# Altium PCB ANTENNA.PcbDoc
Units mm, origin at the board's own origin, x right, y up, seen from the top; angles counter-clockwise.
Board outline 45 x 60 mm, 2 copper layers (Top Layer, Bottom Layer); 4 components, 7 nets, 18 pads, 4 vias.
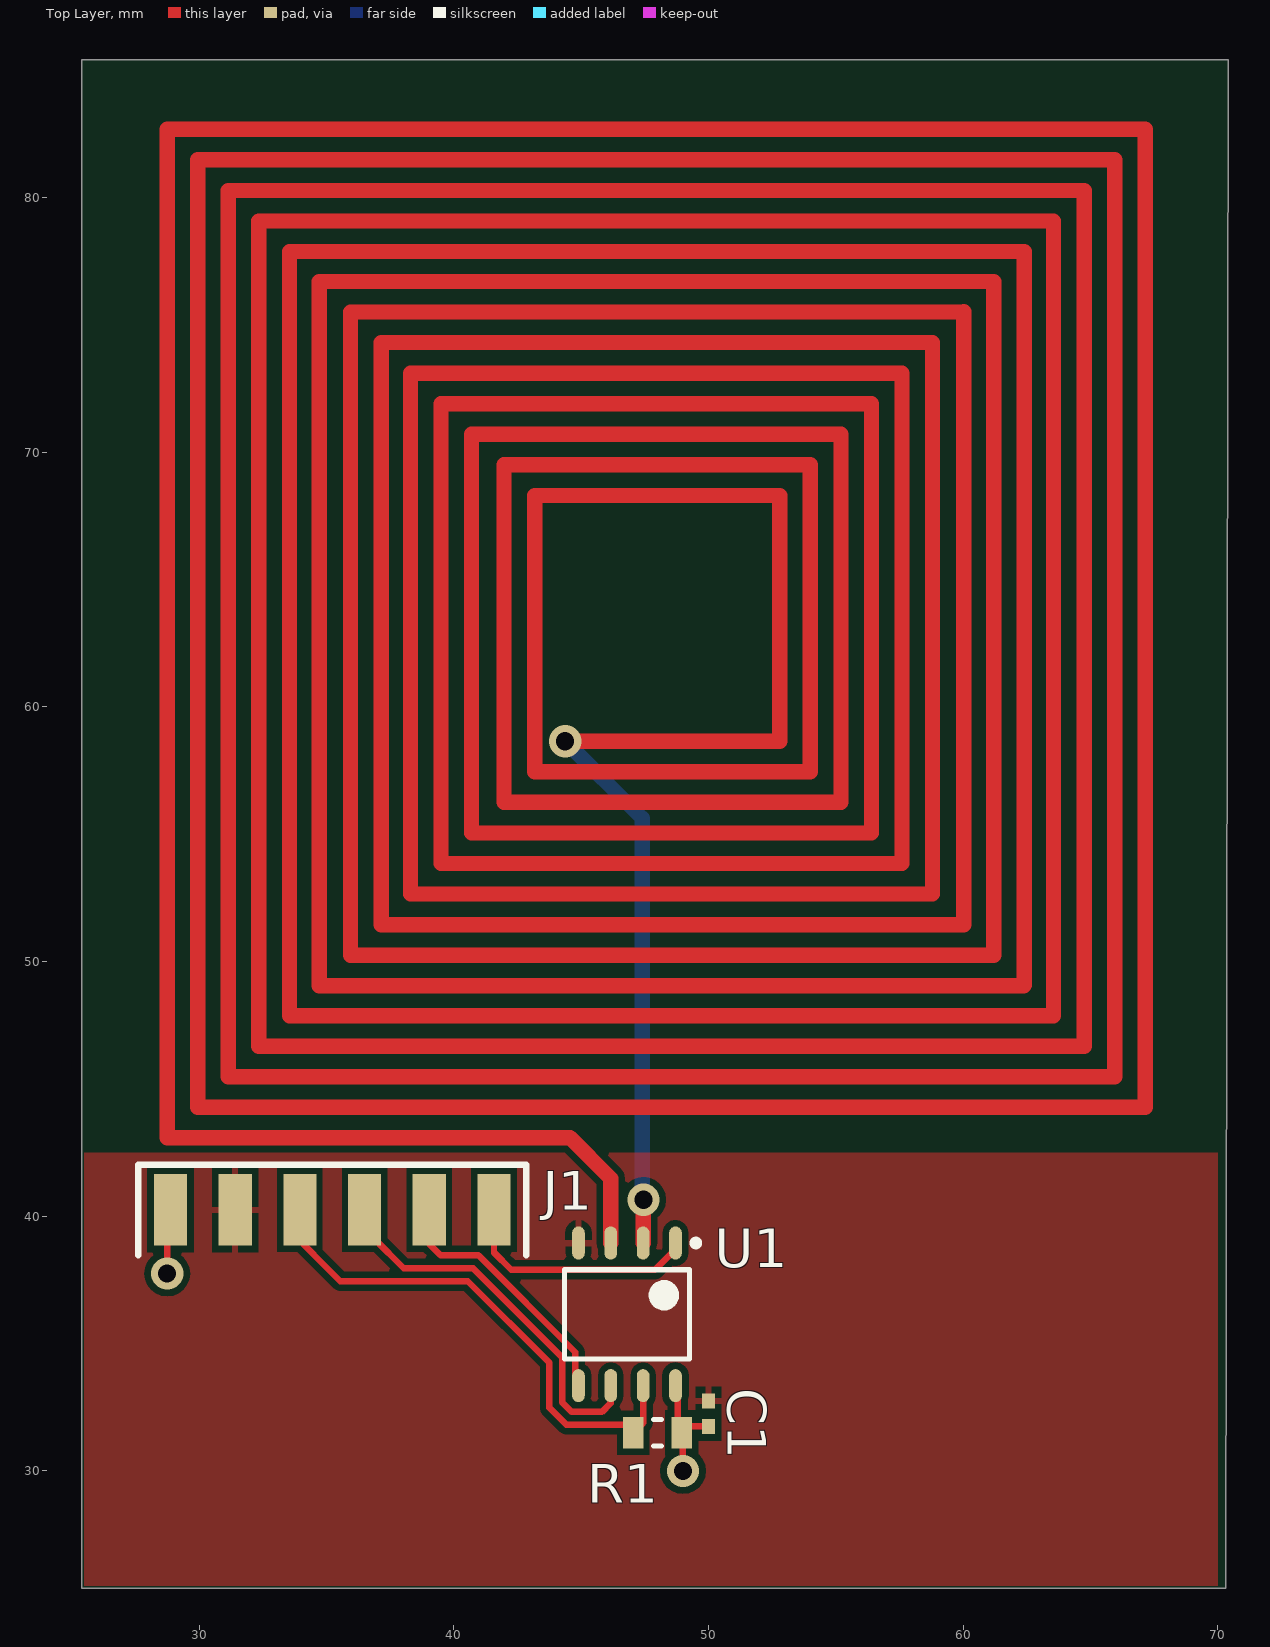
[diagram p0: Top Layer view]
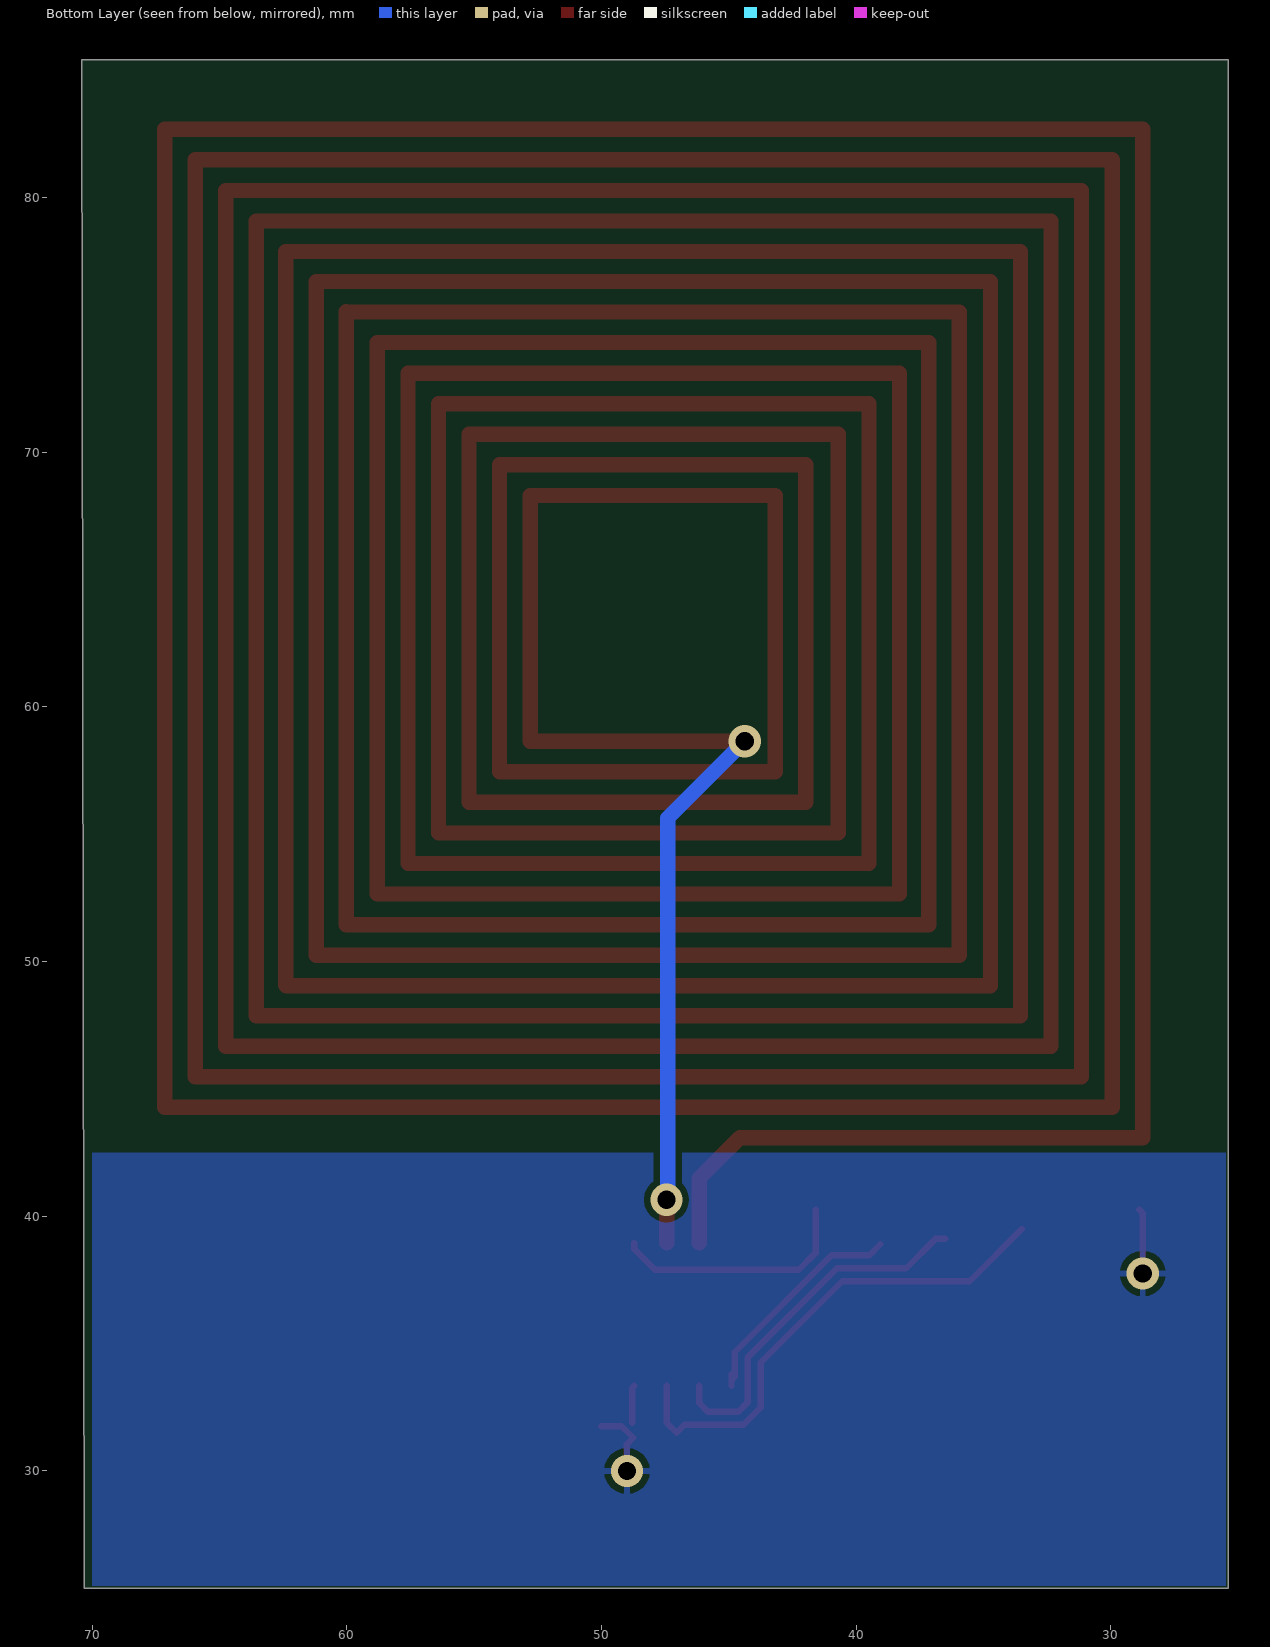
[diagram p1: Bottom Layer view, seen from below]
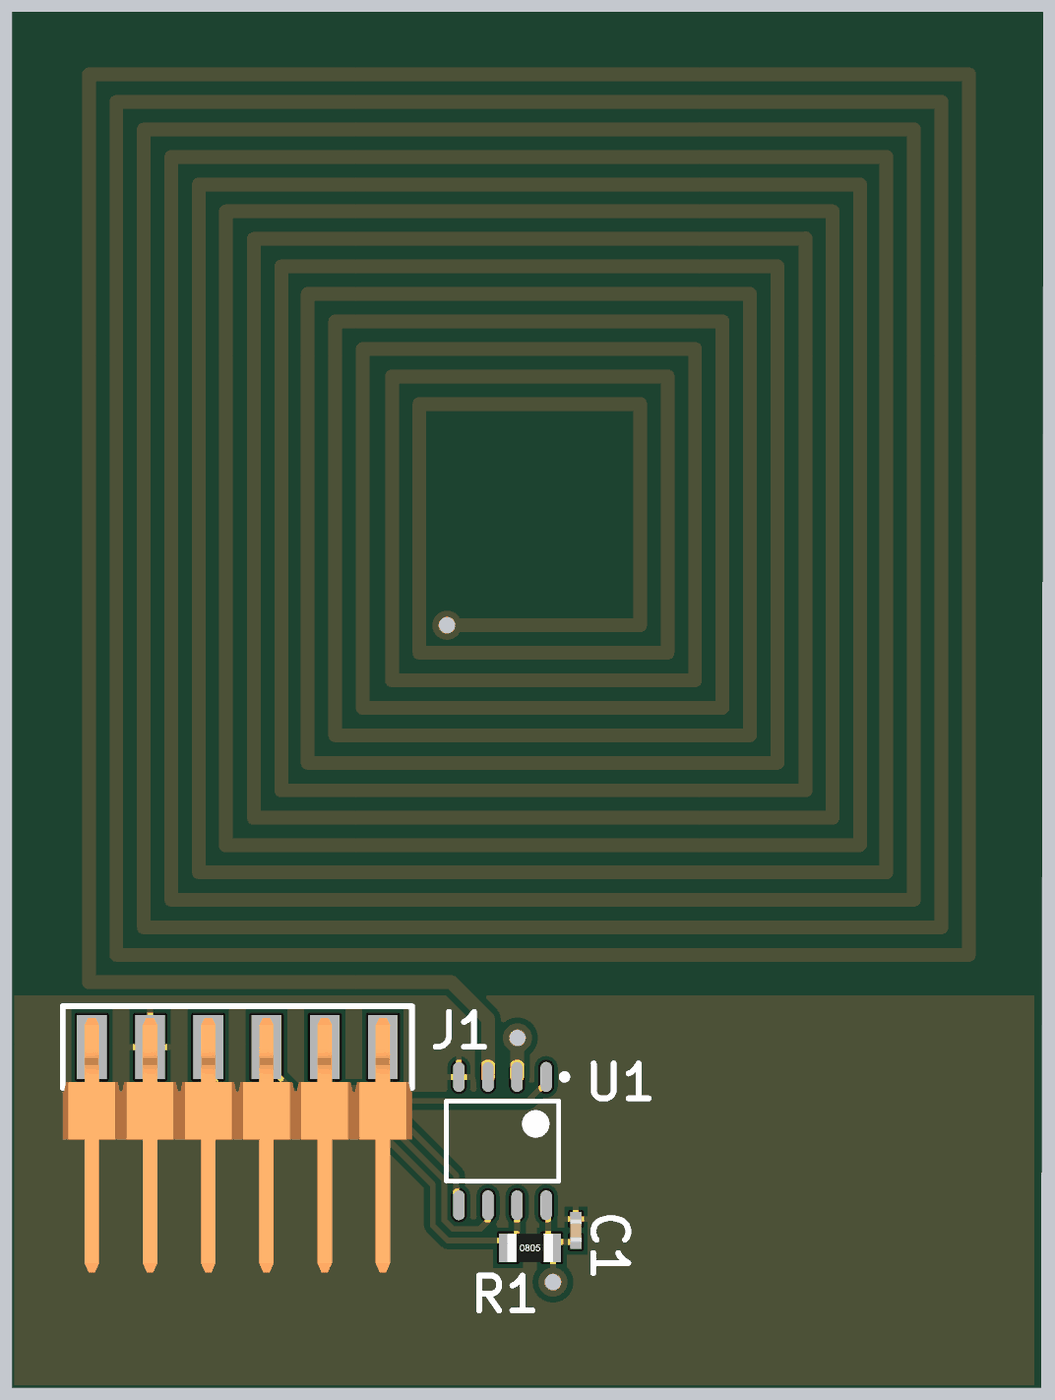
[diagram p2: 3D render of the assembled board from above, using the file's embedded part models]

## Layer stack, top to bottom
Top Solder: solder mask 0.0102, Solder Resist, Dk 3.5
Top Layer: signal copper 0.0356
Dielectric 1: dielectric 0.32, FR-4, Dk 4.8
Bottom Layer: signal copper 0.0356
Bottom Solder: solder mask 0.0102, Solder Resist, Dk 3.5

## Board outline
25.4,25.4 70.3,25.4 70.4,85.4 25.4,85.4

## Design rules (kind name [scope] priority, off if disabled: settings)
Clearance [All] p1: gap=0.254 ignorepadtopadclearanceinfootprint=FALSE except(0: Arc-Hole Track-Hole SMDPad-Hole THPad-Hole Via-Hole Fill-Hole Poly-Hole Region-Hole Text-Hole)
PolygonConnect [All] p1: connectstyle=Relief reliefconductorwidth=0.254 reliefentries=4 polygonreliefangle="90 Angle" airgapwidth=0.254
RoutingVias [All] p1: holewidth=0.711 width=1.27 viastyle="Through Hole" minholewidth=0.711 minwidth=1.27 maxholewidth=0.711 maxwidth=1.27
SolderMaskExpansion [All] p1: expansion=0.102
Width [All] p1: maxlimit=0.254 minlimit=0.254 preferedwidth=0.254
30 further rules are at their usual default settings.

## Components (designator, comment, footprint, x,y, rotation, side; value= is the part's Value field where it differs from the comment)
C1 "399-3520-1-ND" C0402 50,32.25 r270 top value=1e-07
J1 "CONN HEADER 6POS RA SMT" CONN_1X6_RA_SMT 28.88,40.25 r0 top
R1 "__template_resistor" R0805 48,31.5 r0 top
U1 "ST_RFIDCHIP_M24LR04E-R" "M24LR04E-R SO8N" 46.8,36.15 r270 top

## Footprints (in the part's own frame and the unit in brackets; to place one, negate y for a bottom-side part, rotate by r counter-clockwise, add the part's x,y. Pads: shape width x height; smd on the part's side, far side on the other; paste and mask are expansions set on the pad)
C0402 [mm] "Chip Capacitor, 2-Leads, Body 1.0x0.5mm, IPC High Density"
  rect 0.6x0.5 smd: 1(-0.5,0) 2(0.5,0)
  body extent -0.5,-0.25 0.5,0.25, height 0.5
CONN_1X6_RA_SMT [mm] "6 Positions Header, Unshrouded Connector 0.100\" (2.54mm) Surface Mount, Right Angle Gold"
  rect 1.3x2.8 smd: 1(0,0) 2(2.54,0) 3(5.08,0) 4(7.62,0) 5(10.16,0) 6(12.7,0)
  silkscreen extent -1.27,-1.78 13.97,1.78, body extent -1.27,-9.83 13.97,1.27, height 2.5
"M24LR04E-R SO8N" [mm] "SOP, 8-Leads, Body 4.85x3.85mm, Pitch 1.27mm, IPC Medium Density"
  oval 1.3x0.5 smd: 1(-2.8,1.905) 2(-2.8,0.635) 3(-2.8,-0.635) 4(-2.8,-1.905) 5(2.8,-1.905) 6(2.8,-0.635) 7(2.8,0.635) 8(2.8,1.905)
  silkscreen extent -2.92,-2.45 1.75,2.83, body extent -1.95,-2.45 1.95,2.45, height 1.75
R0805 [mm] "Chip Resistor, 2-Leads, Body 2.0x1.3mm, IPC High Density"
  rect 0.8x1.25 smd: 1(-0.95,0) 2(0.95,0)
  silkscreen extent -0.15,-0.53 0.15,0.53, body extent -1,-0.62 1,0.63, height 0.6

## Part data
C1: human_value=100n, package=0402, tolerance=10%, voltage=10.0, price=0.06, Supplier Part Number 1=399-3520-1-ND, type=capacitor
J1: library part CONN_1x6_RA_SMT, Color=Black, Manufacturer=3M, Manufacturer Part Number=961106-5500-AR-PR, Supplier Part Number 1=3M9501CT-ND, Category="Connectors, Interconnects", ComponentLink1Description=http://multimedia.3m.com/mws/media/548463O/3mtm-pin-strip-header-ts2184.pdf, ComponentLink1URL=http://multimedia.3m.com/mws/media/548463O/3mtm-pin-strip-header-ts2184.pdf, Connector Type="Header, Unshrouded", Contact Finish=Gold, Contact Finish Thickness=Flash, Contact Mating Length="0.230\" (5.84mm)", Contact Type="Male Pin", Fastening Type=-, Features=-, Mounting Type="Surface Mount, Right Angle", Number of Positions=6, Number of Positions Loaded=All, Number of Rows=1, Packaging="Cut Tape (CT)", Part Status=Active, Pitch="0.100\" (2.54mm)", Pricing 1="1=1.96, 10=1.779, 25=1.67, 50=1.5972, 100=1.5246, 250=1.3794 (USD)", RoHS="RoHS Compliant", Row Spacing=-, Stock 1=4085, Supplier 1=Digi-Key, Termination=Solder
R1: library part "RES SMD 4.7K OHM 1% 1/8W 0805", Manufacturer=Yageo, Manufacturer Part Number=RC0805FR-074K7L, Operating Temperature="-55°C ~ 155°C", Power (Watts)="0.125W, 1/8W", Resistance="4.7 k?", Resistance (Sortable)=4700, Supplier Part Number 1=311-4.70KCRCT-ND, Temperature Coefficient=±100ppm/°C, tolerance=±1%, Datasheets=http://www.yageo.com/documents/recent/PYu-RC_Group_51_RoHS_L_9.pdf, Image=//media.digikey.com/Renders/Yageo%20Renders/0805-(2012-Metric).jpg, Supplier 1=Digikey
U1: "Dynamic NFC/RFID tag IC with 4-Kbit EEPROM,  energy harvesting, I²C bus and ISO 15693 RF interface", Frequency=13.56MHz, Manufacturer=STMicroelectronics, Manufacturer Part Number=M24LR04E-RMN6T/2, Operating Temperature="-40°C ~ 85°C", Package / Case="8-SOIC (0.154\", 3.90mm Width)", Supplier Device Package=8-SO, Supplier Part Number 1=497-12878-1-ND, Voltage - Supply="1.8 V ~ 5.5 V", Category="RF/IF and RFID", ComponentLink1Description=http://www.st.com/content/ccc/resource/technical/document/datasheet/4e/fd/ac/70/b2/bc/43/fa/DM00038059.pdf/files/DM00038059.pdf/jcr:content/translations/en.DM00038059.pdf, ComponentLink1URL=http://www.st.com/content/ccc/resource/technical/document/datasheet/4e/fd/ac/70/b2/bc/43/fa/DM00038059.pdf/files/DM00038059.pdf/jcr:content/translations/en.DM00038059.pdf, Interface=I²C, Packaging="Cut Tape (CT)", Part Status=Active, Pricing 1="1=0.72, 10=0.661, 100=0.5798, 500=0.5664, 1000=0.54597 (USD)", RoHS="RoHS Compliant", Standards="ISO 15693, ISO 18000-3, NFC", Stock 1=2742, Supplier 1=Digi-Key, type="RFID Transponder"

## Via types
v1: diameter 1.27, hole 0.711, Top Layer to Bottom Layer, tented both sides, 3 vias
v2: diameter 1.27, hole 0.711, Top Layer to Bottom Layer, 1 vias

## Nets (pads, with @x,y where several pads share a name; then routed paths per layer and width w, separated by ;. In a path a pad name is that pad's centre, name@x,y a point inside that pad or via, vN(x,y) a via of type N, cw(c..) or ccw(c..) an arc to the next point about the centre after c; other vN are vias at no path point)
+2.8V: C1.2 J1.1 R1.2 U1.8 | length 6.9
  Top Layer w0.254: v2(28.75,37.75) 28.75,40.12 J1.1 ; U1.8 48.8,33.255 R1.2@48.8,31.9 ; v1(49,30) 49,31.05 48.75,31.3 R1.2 49.2,31.75 C1.2
+H_OUT: J1.6 U1.1 | length 9.7
  Top Layer w0.254: J1.6 41.58,38.575 42.255,37.9 47.9,37.9 48.705,38.705 U1.1
Coil: U1.2 U1.3 | length 1291.6
  Top Layer w0.254: v1@47.435,40.635 v1(47.45,40.65) ; 60,75.5 60.025,75.525 ; 62.375,49.05 62.4,49.075
  Top Layer w0.6: v1(44.375,58.65) 52.8,58.65 52.8,68.3 43.175,68.3 43.175,57.45 54,57.45 54,69.5 41.975,69.5 41.975,56.25 55.2,56.25 55.2,70.7 40.7,70.7 40.7,55.05 56.4,55.05 56.4,71.9 39.5,71.9 39.5,53.85 57.6,53.85 57.6,73.1 38.3,73.1 38.3,52.65 58.8,52.65 58.8,74.3 37.15,74.3 37.15,51.45 60.025,51.45 60.025,75.525 ; U1.3 46.165,41.485 44.565,43.085 28.75,43.085 28.75,82.675 67.15,82.675 67.15,44.275 29.95,44.275 29.95,81.475 65.95,81.475 65.95,45.475 31.15,45.475 31.15,80.275 64.75,80.275 64.75,46.675 32.35,46.675 32.35,79.075 63.55,79.075 63.55,47.875 33.55,47.875 33.55,77.875 62.4,77.875 62.4,49.075 ; U1.2 v1@47.435,40.635 ; 60,75.5 35.95,75.5 35.95,50.25 61.2,50.25 61.2,76.7 34.725,76.7 34.725,49.05 62.375,49.05
  Bottom Layer w0.6: v1(44.375,58.65) 47.4,55.625 v1@47.4,40.65
GND: C1.1 J1.2 U1.4
RF_BUSY: J1.3 R1.1 U1.7 | length 19.9
  Top Layer w0.254: J1.3@33.5,39.5 35.547,37.453 40.547,37.453 43.756,34.244 43.756,32.478 44.423,31.811 46.739,31.811 R1.1 47.435,31.885 U1.7
SCL: J1.4 U1.6 | length 14.3
  Top Layer w0.254: J1.4@36.51,39.11 36.89,39.11 38.039,37.961 40.757,37.961 44.264,34.454 44.264,32.689 44.634,32.319 45.819,32.319 46.165,32.665 U1.6
SDA: J1.5 U1.5 | length 9.1
  Top Layer w0.254: J1.5@39.05,38.9 39.481,38.469 40.968,38.469 44.772,34.665 44.772,33.696 U1.5@44.895,33.573 ; U1.5 U1.5@44.895,33.573 ; U1.5@44.895,33.805 U1.5@44.895,33.573

## Polygon pours and split planes (outlines as drawn)
+2.8V on Bottom Layer "+2.8V" (solid, pour order 4): 25.5,25.5 25.5,42.5 70,42.5 70,25.5
GND on Top Layer "GND Pour" (solid, pour order 0): 25.5,25.5 25.5,42.5 70,42.5 70,25.5